# Altium PCB SC8701_EVM_RE1_0624.PcbDoc
Units mil, origin at the board's own origin, x right, y up, seen from the top; angles counter-clockwise.
Board outline 3937.01 x 2559.06 mil, 2 copper layers (Top Layer, Bottom Layer), stack 60.433 mil thick; 126 components, 56 nets, 343 pads, 339 vias.
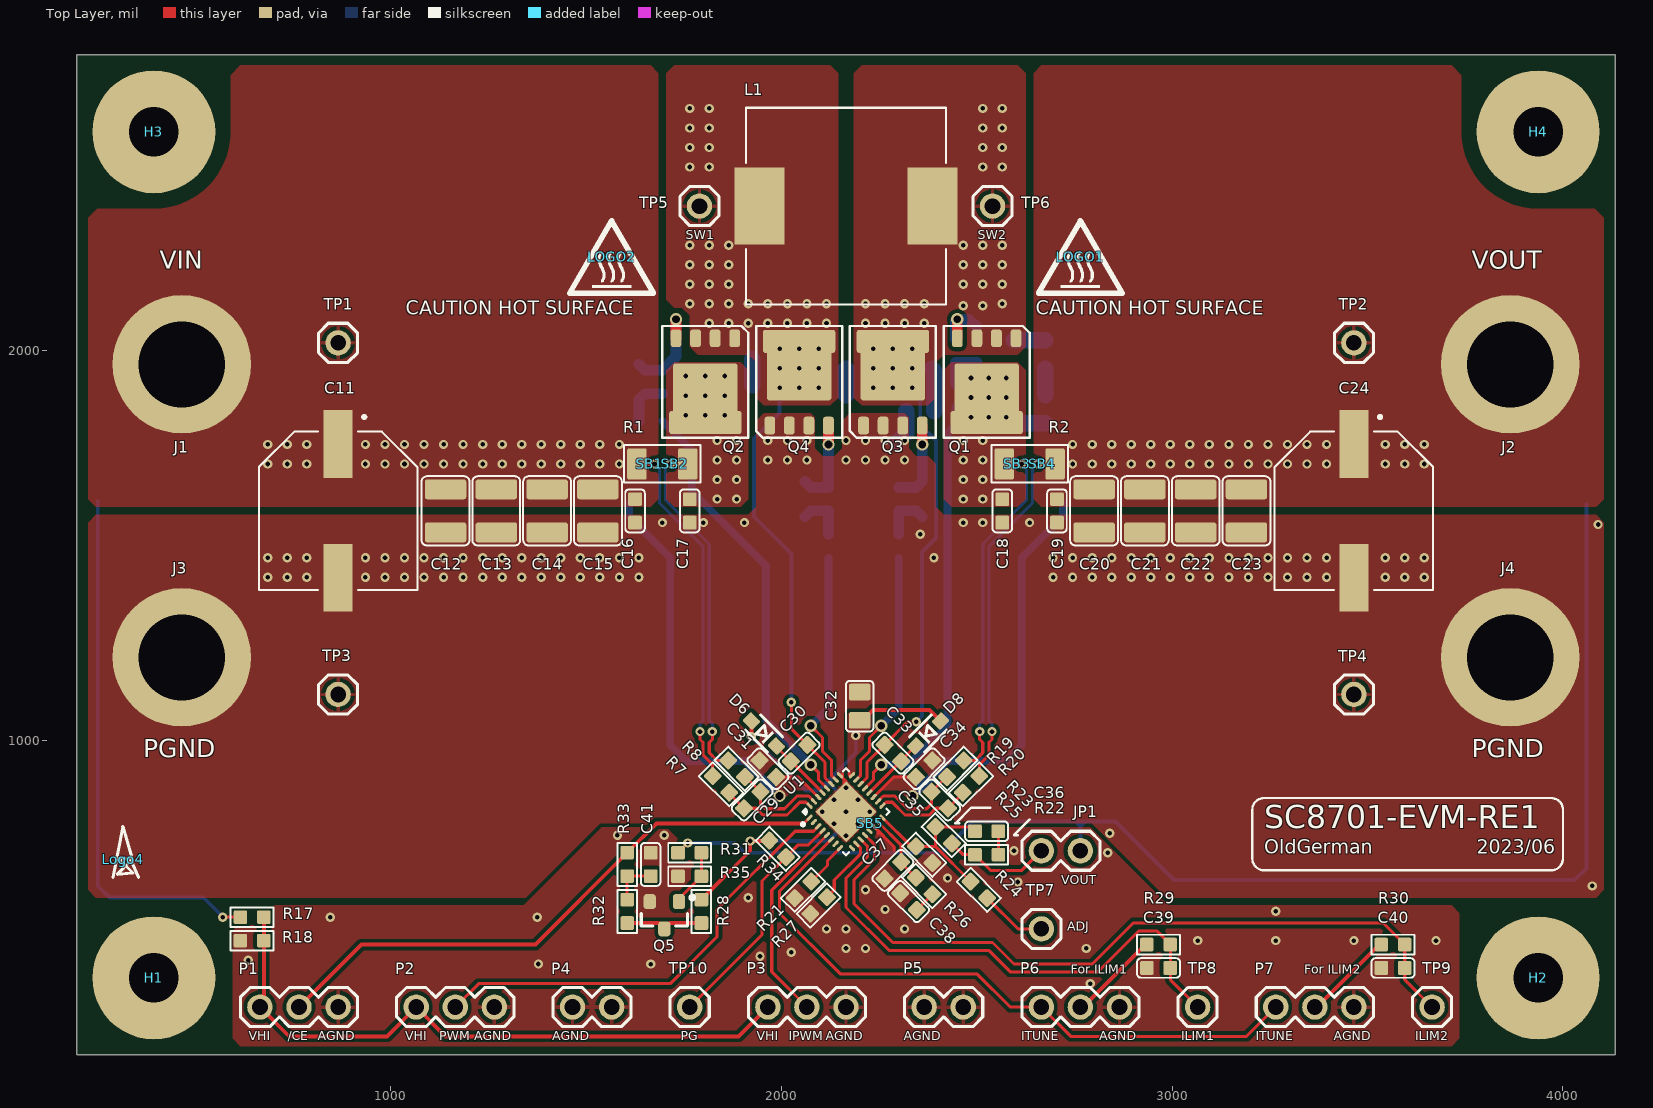
[diagram p0: Top Layer view]
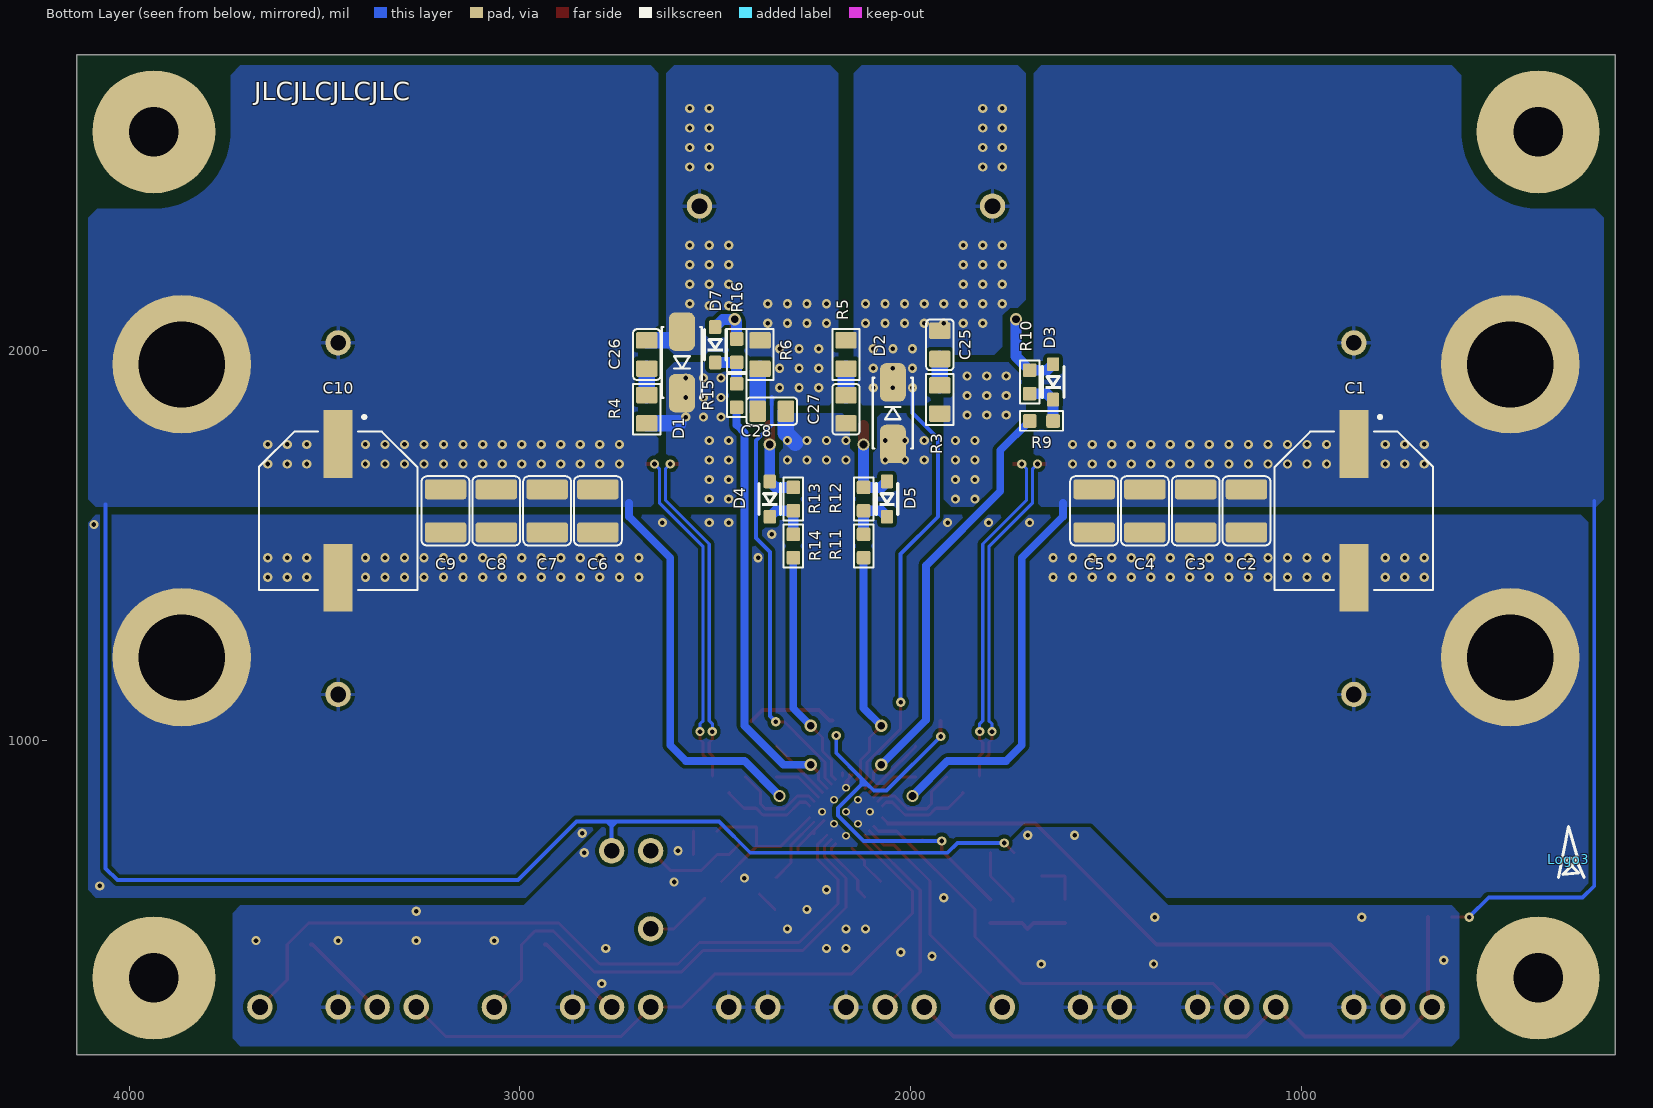
[diagram p1: Bottom Layer view, seen from below]
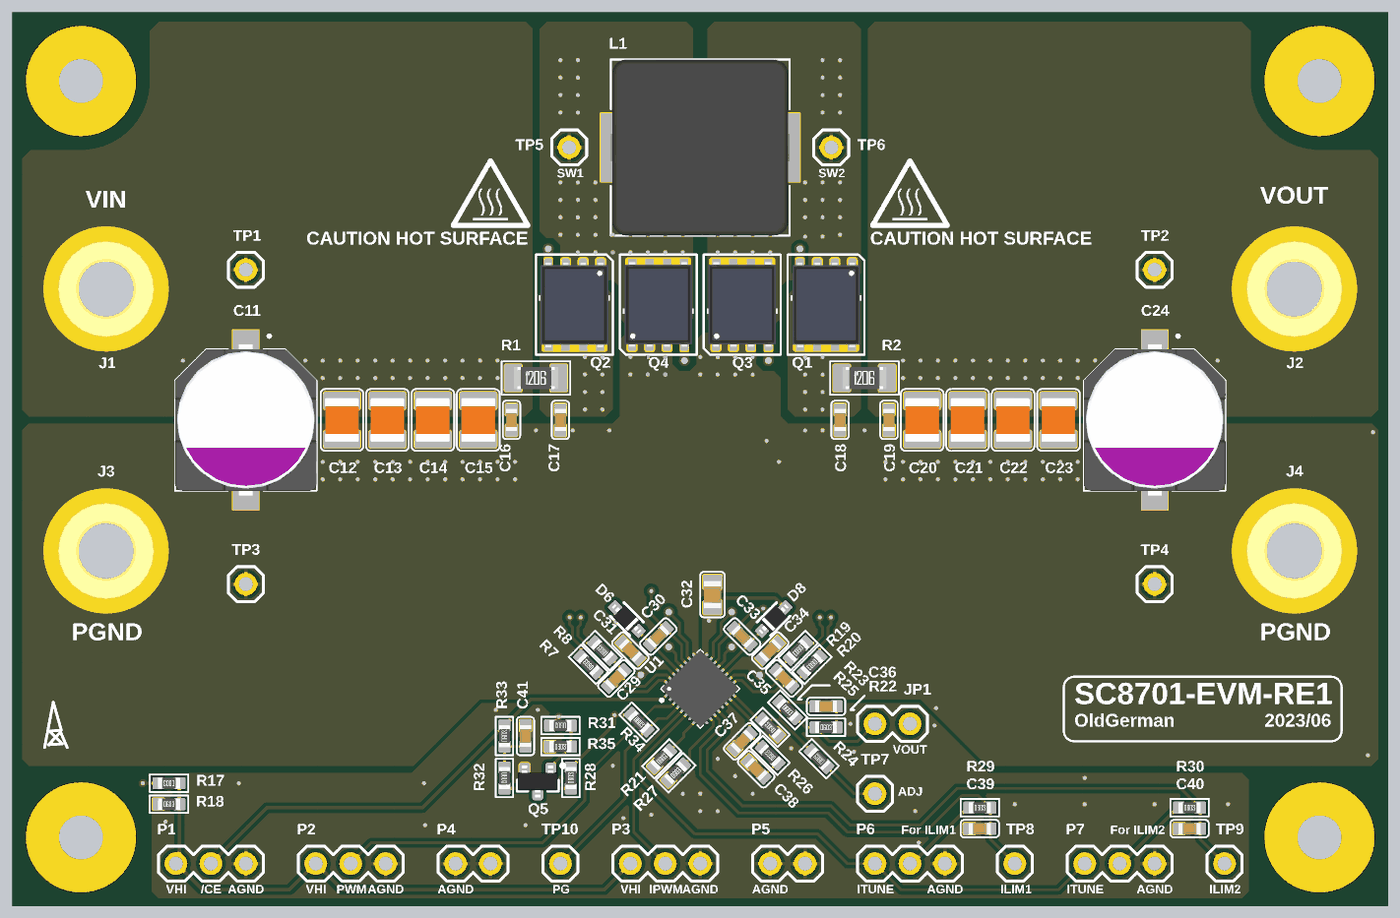
[diagram p2: 3D render of the assembled board from above, using the file's embedded part models]
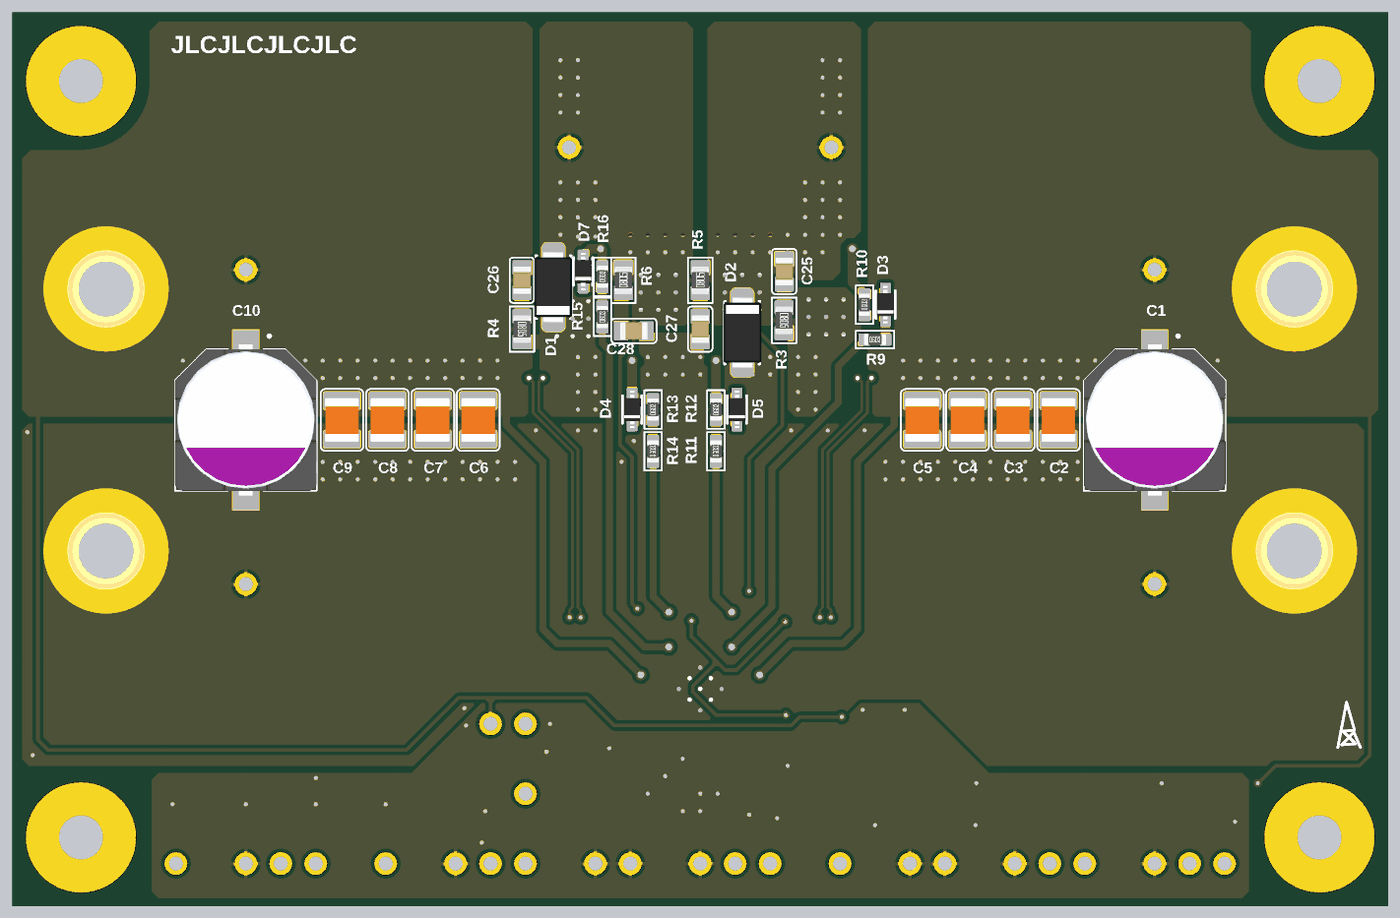
[diagram p3: 3D render of the assembled board from below, using the file's embedded part models]

## Layer stack, top to bottom
Top Solder: solder mask 0.4, Solder Resist, Dk 3.5
Top Layer: signal copper 1.378
Dielectric2: core 57.6772, Dk 4.2
Bottom Layer: signal copper 1.378
Bottom Solder: solder mask 0.4, Solder Resist, Dk 3.5

## Board outline
196.85,196.85 196.85,2755.91 4133.86,2755.91 4133.86,196.85

## Design rules (kind name [scope] priority, off if disabled: settings)
BoardOutlineClearance [All] p1: gap=11.81 ignorepadtopadclearanceinfootprint=FALSE except(0: Arc-SplitContinuation Track-SplitContinuation SMDPad-SplitContinuation THPad-SplitContinuation Via-SplitContinuation Fill-SplitContinuation Poly-SplitContinuation Region-SplitContinuation Text-SplitContinuation)
Clearance "Stitching VOUT" [IsStitchingVia and InNet('VOUT') vs (IsVia and (Not IsStitchingVia)) Or IsPad] p1: gap=5 ignorepadtopadclearanceinfootprint=FALSE
Clearance "PGND vs via" [(InNet('GND') AND InPolygon) vs IsVia] p2: gap=12 ignorepadtopadclearanceinfootprint=FALSE except(0: Arc-Hole Track-Hole SMDPad-Hole THPad-Hole Via-Hole Fill-Hole Poly-Hole Region-Hole Text-Hole)
Clearance "pour clearance_1" [InPolygon] p3: gap=10 ignorepadtopadclearanceinfootprint=FALSE except(0: Arc-Hole Track-Hole SMDPad-Hole THPad-Hole Via-Hole Fill-Hole Poly-Hole Region-Hole Text-Hole)
Clearance [All] p4: gap=7.8 ignorepadtopadclearanceinfootprint=FALSE except(0: Arc-Hole Track-Hole SMDPad-Hole THPad-Hole Via-Hole Fill-Hole Poly-Hole Region-Hole Text-Hole; 5.91: Arc-Via Track-Via SMDPad-SMDPad)
DiffPairsRouting [All] p1: maxlimit=10 minlimit=7.87 mostfreqgap=7.87 toplayer_minwidth=7.87 toplayer_maxwidth=15 toplayer_prefwidth=7.87 bottomlayer_minwidth=7.87 bottomlayer_maxwidth=15 bottomlayer_prefwidth=7.87 maxuncoupledlength=500
HoleSize [All] p1: absolutevalues=TRUE maxlimit=270 minlimit=11 maxpercent=80.000 minpercent=20.000
MinimumSolderMaskSliver [All] p1: minsoldermaskwidth=0
PolygonConnect HOLE_J1-J4 [InComponent('J1') OR InComponent('J2') OR InComponent('J3') OR InComponent('J4')] p1: connectstyle=Direct reliefconductorwidth=10 reliefentries=4 polygonreliefangle="90 Angle" airgapwidth=10
PolygonConnect HOLE [All] p2: thpad.connectstyle=Relief thpad.reliefconductorwidth=10 thpad.reliefentries=4 thpad.polygonreliefangle="90 Angle" thpad.airgapwidth=10 smdpad.connectstyle=Direct smdpad.reliefconductorwidth=10 smdpad.reliefentries=4 smdpad.polygonreliefangle="90 Angle" smdpad.airgapwidth=10 via.connectstyle=Direct via.reliefconductorwidth=10 via.reliefentries=4 via.polygonreliefangle="90 Angle" via.airgapwidth=10
PolygonConnect [All] p3: connectstyle=Direct reliefconductorwidth=10 reliefentries=4 polygonreliefangle="90 Angle" airgapwidth=10
RoutingVias [All] p1: holewidth=11.81 width=23.62 viastyle="Through Hole" minholewidth=11.81 minwidth=23.62 maxholewidth=39.37 maxwidth=78.74
ShortCircuit [InNet('AGND') vs InNet('PGND')] p1: allowed=TRUE
SilkToSilkClearance [All] p1 off: silktosilkclearance=7
SilkToSolderMaskClearance [IsPad] p1 off: minsilkscreentomaskgap=7 clearancetoexposedcopper=TRUE
SolderMaskExpansion SolderMaskExpansion_Via [ObjectKind = 'Via'] p1: expansion=2 istentingtop=TRUE
SolderMaskExpansion [All] p2: expansion=2 istentingtop=FALSE
Width [All] p1: maxlimit=100 minlimit=7.87 preferedwidth=7.87
24 further rules are at their usual default settings.

## Classes and differential pairs
differential pair SNS2: +SNS2_P -SNS2_N
differential pair SNS1: +SNS1_P -SNS1_N
differential pair .SNS2: +.SNS2_P -.SNS2_N
differential pair .SNS1: +.SNS1_P -.SNS1_N

## Components (designator, comment, footprint, x,y, rotation, side; value= is the part's Value field where it differs from the comment)
C1 "100uF/50V" "CAP OS-CON D=10.0 L=10.0 F10" 865.35,1588.9 r270 bottom
C2 "10uF/50V" C1210 1140.35,1588.9 r90 bottom
C3 "10uF/50V" C1210 1270.35,1588.9 r90 bottom
C4 "10uF/50V" C1210 1400.35,1588.9 r90 bottom
C5 "10uF/50V" C1210 1530.35,1588.9 r90 bottom
C6 "10uF/50V" C1210 2800.35,1588.9 r90 bottom
C7 "10uF/50V" C1210 2930.35,1588.9 r90 bottom
C8 "10uF/50V" C1210 3060.35,1588.9 r90 bottom
C9 "10uF/50V" C1210 3190.35,1588.9 r90 bottom
C10 "100uF/50V" "CAP OS-CON D=10.0 L=10.0 F10" 3465.35,1588.9 r270 bottom
C11 "100uF/50V" "CAP OS-CON D=10.0 L=10.0 F10" 865.35,1588.9 r270 top
C12 "10uF/50V" C1210 1140.35,1588.9 r90 top
C13 "10uF/50V" C1210 1270.35,1588.9 r90 top
C14 "10uF/50V" C1210 1400.35,1588.9 r90 top
C15 "10uF/50V" C1210 1530.35,1588.9 r90 top
C16 "100nF/50V" C0603 1625.35,1588.9 r90 top
C17 "100nF/50V" C0603 1765.35,1588.9 r90 top
C18 "100nF/50V" C0603 2565.35,1588.9 r90 top
C19 "100nF/50V" C0603 2705.35,1588.9 r90 top
C20 "10uF/50V" C1210 2800.35,1588.9 r90 top
C21 "10uF/50V" C1210 2930.35,1588.9 r90 top
C22 "10uF/50V" C1210 3060.35,1588.9 r90 top
C23 "10uF/50V" C1210 3190.35,1588.9 r90 top
C24 "100uF/50V" "CAP OS-CON D=10.0 L=10.0 F10" 3465.35,1588.9 r270 top
C25 "NPO/NC" C0805 1925.08,2013.85 r270 bottom
C26 "NPO/NC" C0805 2675.35,1988.9 r270 bottom
C27 "NPO/NC" C0805 2165.35,1848.9 r90 bottom
C28 "NPO/NC" C0805 2355.35,1843.9 r0 bottom
C29 "47pF/6.3V" C0603 1925.35,848.9 r45 top
C30 "100nF/16V" C0603 2045.35,968.9 r45 top
C31 "1uF/50V" C0603 1965.35,928.9 r135 top
C32 "1uF/25V" C0805 2200.35,1088.9 r90 top
C33 "100nF/16V" C0603 2285.35,968.9 r315 top
C34 "1uF/50V" C0603 2365.35,928.9 r45 top
C35 "47pF/6.3V" C0603 2405.35,848.9 r315 top
C36 "NC" C0603 2525.35,768.9 r0 top
C37 "NC" C0603 2285.35,668.9 r45 top
C38 "15nF/6.3V" C0603 2325.35,588.9 r315 top
C39 "10nF/6.3V" C0603 2965.35,418.9 r0 top
C40 "10nF/6.3V" C0603 3565.35,418.9 r0 top
C41 "1uF/50V" C0603 1665.35,683.9 r90 top
D1 "SS54F" SMAF 2585.35,1968.9 r270 bottom
D2 "SS54F" SMAF 2045.35,1838.9 r90 bottom
D3 "1N4148" SOD-323 1635.35,1918.9 r270 bottom
D4 "1N4148" SOD-323 2360.35,1618.9 r270 bottom
D5 "1N4148" SOD-323 2060.35,1618.9 r270 bottom
D6 "1N4148" SOD-323 1955.35,1018.9 r315 top
D7 "1N4148" SOD-323 2500.35,2013.9 r270 bottom
D8 "1N4148" SOD-323 2375.35,1018.9 r225 top
H1 "HOLE" "M3.2 D=8" 393.7,393.7 r0 top
H2 "HOLE" "M3.2 D=8" 3937.01,393.7 r0 top
H3 "HOLE" "M3.2 D=8" 393.7,2559.06 r0 top
H4 "HOLE" "M3.2 D=8" 3937.01,2559.06 r0 top
J1 "U6047" JACK_BANANA_U6047 465.35,1963.9 r180 top
J2 "U6047" JACK_BANANA_U6047 3865.35,1963.9 r270 top
J3 "U6047" JACK_BANANA_U6047 465.35,1213.9 r180 top
J4 "U6047" JACK_BANANA_U6047 3865.35,1213.9 r270 top
JP1 "CONN_X2_DOT" 2.54mm_Male_x2 2765.35,718.9 r180 top
L1 "3.3uH" "INDUCTOR 1350 12.6X13.5X5.0mm" 2165.35,2368.9 r0 top locked
LOGO1 "CAUTION HOT SURFACE" IEC_HotSurface_Small 2765.35,2238.9 r0 top
LOGO2 "CAUTION HOT SURFACE" IEC_HotSurface_Small 1565.35,2238.9 r0 top
Logo3 "OldGerman Symbol" ODG_LOGO 315.35,696.9 r180 bottom
Logo4 "OldGerman Symbol" ODG_LOGO 315.35,696.9 r0 top
P1 "CONN_X3" 2.54mm_Male_x3 665.35,318.9 r0 top
P2 "CONN_X3" 2.54mm_Male_x3 1265.35,318.9 r180 top
P3 "CONN_X3" 2.54mm_Male_x3 2165.35,318.9 r180 top
P4 "CONN_X2" 2.54mm_Male_x2 1465.35,318.9 r0 top
P5 "CONN_X2" 2.54mm_Male_x2 2365.35,318.9 r0 top
P6 "CONN_X3" 2.54mm_Male_x3 2665.35,318.9 r0 top
P7 "CONN_X3" 2.54mm_Male_x3 3465.35,318.9 r180 top
Q1 "N-MOS_GDS" "SO8FL ROUND" 2525.35,1918.9 r270 top
Q2 "N-MOS_GDS" "SO8FL ROUND" 1805.35,1918.9 r270 top
Q3 "N-MOS_GDS" "SO8FL ROUND" 2285.35,1918.9 r90 top
Q4 "N-MOS_GDS" "SO8FL ROUND" 2045.35,1918.9 r90 top
Q5 "N-MOS" "INFINEON SOT-23-3" 1700.35,553.9 r270 top
R1 "10mR" R1206 1695.35,1708.9 r0 top
R2 "10mR" R1206 2635.35,1708.9 r0 top
R3 "NC" R0805 1925.35,1873.9 r270 bottom
R4 "NC" R0805 2675.35,1848.9 r270 bottom
R5 "NC" R0805 2165.35,1988.9 r90 bottom
R6 "NC" R0805 2385.35,1988.9 r90 bottom
R7 "1K" R0603 1845.35,888.9 r135 top
R8 "1K" R0603 1885.35,928.9 r135 top
R9 "0R" R0603 1665.35,1818.9 r180 bottom
R10 "0R" R0603 1695.35,1918.9 r90 bottom
R11 "0R" R0603 2120.35,1498.9 r90 bottom
R12 "0R" R0603 2120.35,1618.9 r90 bottom
R13 "0R" R0603 2300.35,1618.9 r90 bottom
R14 "0R" R0603 2300.35,1498.9 r90 bottom
R15 "0R" R0603 2445.35,1883.9 r90 bottom
R16 "0R" R0603 2445.35,1998.9 r90 bottom
R17 "100K" R0603 645.35,548.9 r180 top
R18 "150K" R0603 645.35,488.9 r0 top
R19 "1K" R0603 2445.35,928.9 r225 top
R20 "1K" R0603 2485.35,888.9 r225 top
R21 "0R" R0603 2055.35,618.9 r45 top
R22 "NC" R0603 2525.35,708.9 r0 top
R23 "100K" R0603 2415.35,758.9 r315 top
R24 "NC" R0603 2505.35,618.9 r135 top
R25 "32.4K" R0603 2365.35,708.9 r135 top
R26 "15K" R0603 2365.35,628.9 r135 top
R27 "68K" R0603 2095.35,578.9 r45 top
R28 "200K" R0603 1795.35,563.9 r90 top
R29 "12.1K" R0603 2965.35,478.9 r0 top
R30 "40.2K" R0603 3565.35,478.9 r0 top
R31 "10K" R0603 1765.35,713.9 r180 top
R32 "100K" R0603 1605.35,563.9 r270 top
R33 "100K" R0603 1605.35,683.9 r90 top
R34 "100K" R0603 1990.35,723.9 r315 top
R35 "24K" R0603 1765.35,653.9 r0 top
SB1 "NetTie_200um" NetTie_200um 1663.54,1708.9 r180 top net-tie
SB2 "NetTie_200um" NetTie_200um 1727.17,1708.9 r0 top net-tie
SB3 "NetTie_200um" NetTie_200um 2603.54,1708.9 r180 top net-tie
SB4 "NetTie_200um" NetTie_200um 2667.17,1708.9 r0 top net-tie
SB5 "NetTie_200um" NetTie_200um 2227.99,789.67 r135 top net-tie
TP1 "CONN_X1_DOT" 2.54mm_Male_x1 865.35,2018.9 r0 top
TP2 "CONN_X1_DOT" 2.54mm_Male_x1 3465.35,2018.9 r0 top
TP3 "CONN_X1_DOT" 2.54mm_Male_x1 865.35,1118.9 r0 top
TP4 "CONN_X1_DOT" 2.54mm_Male_x1 3465.35,1118.9 r90 top
TP5 "CONN_X1_DOT" 2.54mm_Male_x1 1790.35,2368.9 r0 top
TP6 "CONN_X1_DOT" 2.54mm_Male_x1 2540.35,2368.9 r0 top
TP7 "CONN_X1_DOT" 2.54mm_Male_x1 2665.35,518.9 r0 top
TP8 "CONN_X1_DOT" 2.54mm_Male_x1 3065.35,318.9 r180 top
TP9 "CONN_X1_DOT" 2.54mm_Male_x1 3665.35,318.9 r180 top
TP10 "CONN_X1_DOT" 2.54mm_Male_x1 1765.35,318.9 r0 top
U1 "SC8701 (A)" "TQFN-32 4X4MM 0.4 VIA" 2165.35,818.9 r45 top locked

## Footprints (in the part's own frame and the unit in brackets; to place one, negate y for a bottom-side part, rotate by r counter-clockwise, add the part's x,y. Pads: shape width x height; smd on the part's side, far side on the other; paste and mask are expansions set on the pad)
2.54mm_Male_x1 [mm]
  round 1.65 hole 1.016: 1(0,0)
  silkscreen extent -1.27,-1.27 1.27,1.27
2.54mm_Male_x2 [mm]
  round 1.65 hole 1.016: 1(0,0) 2(2.54,0)
  silkscreen extent -1.27,-1.27 3.81,1.27
2.54mm_Male_x3 [mm]
  round 1.65 hole 1.016: 1(0,0) 2(2.54,0) 3(5.08,0)
  silkscreen extent -1.27,-1.27 6.35,1.27
C0603 [mil]
  rrect20% 35x35 smd: 1(-30,0) 2(30,0)
  silkscreen extent -55,-25 55,25, body extent -31,-16 32,16, height 32
C0805 [mil]
  rrect20% 42.5x55 smd: 1(-36.26,0) 2(36.26,0)
  silkscreen extent -65,-35 65,35, body extent -39,-25 39,25, height 49
C1210 [mm] "Chip Capacitor, 2-Leads, Body 3.20x2.50mm, IPC Medium Density"
  rrect25% 1.3x2.7 smd: 1(-1.4,0) 2(1.4,0)
  silkscreen extent -2.25,-1.55 2.25,1.55, body extent -1.6,-1.25 1.6,1.25, height 2.8
"CAP OS-CON D=10.0 L=10.0 F10" [mm]
  rect 4.4x1.9 smd: 1(-4.35,0) 2(4.35,0)
  silkscreen extent -6.2,-5.15 5.15,5.15, body extent -5.5,-5.15 5.5,5.15, height 10.4
IEC_HotSurface_Small [mil] "CAUTION HOT SURFACE"
  silkscreen extent -107,-93 107,92
"INDUCTOR 1350 12.6X13.5X5.0mm" [mm]
  rect 3.25x5 smd: 1(-5.625,0) 2(5.625,0)
  silkscreen extent -6.5,-6.4 6.5,6.4, body extent -6.5,-6.4 6.5,6.4, height 6.2
"INFINEON SOT-23-3" [mm] "SOT23, 3-Leads, Body 2.90x2.40mm, Pitch 0.95mm, IPC Medium Density"
  rrect50% 0.972x0.802 smd: 1(-0.885,0.95) 2(-0.885,-0.95) 3(0.885,0)
  silkscreen extent -1.27,-1.5 0.7,1.95, body extent -1.16,-1.45 1.16,1.45, height 1
JACK_BANANA_U6047 [mm] "Banana Jack"
  round 9 hole 5.6: 1(0,0)
  body extent -3.49,-3.5 3.49,3.5, height 2
"M3.2 D=8" [mm]
  round 8 hole 3.2: 1(0,0)
NetTie_200um [mm]
  round 0.2 smd paste-2 mask-2: 1(-0.3,0) 2(0.3,0)
  Top Layer region: -0.3,0.1 -0.3,-0.1 0.3,-0.1 0.3,0.1
ODG_LOGO [mil]
  silkscreen extent -26,-46 39,84
R0603 [mil]
  rrect25% 35x35 smd: 1(-30,0) 2(30,0)
  silkscreen extent -55,-25 55,25, body extent -31,-16 31,16, height 18
R0805 [mil]
  rrect20% 42.5x55 smd: 1(-36.26,0) 2(36.26,0)
  silkscreen extent -65,-35 65,35, body extent -39,-25 39,25, height 24
R1206 [mil]
  rrect20% 50x80 smd: 1(-65,0) 2(65,0)
  silkscreen extent -98,-48 98,48, body extent -63,-31 63,31, height 24
SMAF [mm]
  rrect50% 2.5x1.7 smd: 1(-2,0) 2(2,0)
  silkscreen extent -2.3,-1.3 2.3,1.3, body extent -2.6,-1.4 2.6,1.35, height 2.4
"SO8FL ROUND" [mm] "AND9137/D Universal Footprint"
  rrect12% 3.3x4.2 smd paste-10: D(0.438,0)
  rrect20% 1.5x4.7 smd paste-10: D(2.638,0)
  rrect50% 1.15x0.7 smd paste-0.05: G(-2.837,-1.905) S(-2.837,1.905) S(-2.837,-0.635) S(-2.837,0.635)
  rect 0.6x0.9 on Top Paste: ""(-0.662,1.15) ""(-0.662,0) ""(-0.662,-1.15) ""(0.188,1.15) ""(0.188,0) ""(0.188,-1.15) ""(1.038,1.15) ""(1.038,0) ""(1.038,-1.15) ""(1.888,1.15) ""(1.888,0) ""(1.888,-1.15)
  rect 0.9x0.6 on Top Paste: ""(2.888,1.875) ""(2.888,-0.65) ""(2.888,0.65) ""(2.888,-1.875)
  silkscreen extent -3.64,-2.79 3.64,2.8, body extent -3.06,-2.58 3.09,2.57, height 1.13
SOD-323 [mm] "AND9137/D：Universal Footprint for  SO8FL Package"
  rrect25% 0.9x0.8 smd: 1(-1.15,0) 2(1.15,0)
  silkscreen extent -1,-0.7 1,0.7, body extent -1.36,-0.62 1.36,0.63, height 1.05
"TQFN-32 4X4MM 0.4 VIA" [mm]
  oval 0.5x0.2 smd: 1(-1.95,1.4) 2(-1.95,1) 3(-1.95,0.6) 4(-1.95,0.2) 5(-1.95,-0.2) 6(-1.95,-0.6) 7(-1.95,-1) 8(-1.95,-1.4) 17(1.95,-1.4) 18(1.95,-1) 19(1.95,-0.6) 20(1.95,-0.2) 21(1.95,0.2) 22(1.95,0.6) 23(1.95,1) 24(1.95,1.4)
  oval 0.2x0.5 smd: 9(-1.4,-1.95) 10(-1,-1.95) 11(-0.6,-1.95) 12(-0.2,-1.95) 13(0.2,-1.95) 14(0.6,-1.95) 15(1,-1.95) 16(1.4,-1.95) 25(1.4,1.95) 26(1,1.95) 27(0.6,1.95) 28(0.2,1.95) 29(-0.2,1.95) 30(-0.6,1.95) 31(-1,1.95) 32(-1.4,1.95)
  rect 2.8x2.8 smd paste-5: 33(0,0)
  silkscreen extent -2.66,-2 2,2, body extent -2,-2 2,2, height 0.55

## Part data
C1 C10 C11 C24: library part CAP_Polar_Aluminum, "Capacitor"
C2 C3 C4 C5 C6 C7 C8 C9 C12 C13 C14 C15 C16 C17 C18 C19 C20 C21 C22 C23 C25 C26 C27 C28 C29 C30 C31 C32 C33 C34 C35 C36 C37 C38 C39 C40 C41: library part CAP, "Capacitor"
D1 D2 D3 D4 D5 D6 D7 D8: library part Diode, "二极管"
J1 J2 J3 J4: library part JACK_BANANA, "Banana Jack", Manufacturer=Keystone, PartNumber=575-8, Supplier Part Number 1=36-575-8-ND, ComponentLink1Description="Datasheet Link", ComponentLink1URL=http://www.keyelco.com/pdfs/M55p95.pdf, CompType=Connector, LatestRevisionDate=2015-08-25, MountType=TH, PackageReference=Keystone575-8, Publisher="Texas Instruments", RoHS=Y, Supplier 1=Digi-Key, U/M=EA
L1: library part Inductor_power, "135 功率电感 额定电流15A"
LOGO1 LOGO2: library part IEC_HotSurface, "IEC 61010-1 Hot Surface Warning", LatestRevisionDate=2014-11-20, Published=2009-03-03, Publisher="Texas Instruments", SymbolCreator=a0412235, SymbolVersion=2011-08-22
Logo3 Logo4: library part OldGeman, LatestRevisionDate=2014-11-20, Published=2009-03-03, Publisher="Texas Instruments", SymbolCreator=a0412235, SymbolVersion=2011-08-22
Q5: library part N-MOS_123
R1 R2 R3 R4 R5 R6 R7 R8 R9 R10 R11 R12 R13 R14 R15 R16 R17 R18 R19 R20 R21 R22 R23 R24 R25 R26 R27 R28 R29 R30 R31 R32 R33 R34 R35: library part RES, "IEC Standard"
SB1 SB2 SB3 SB4 SB5: library part "NetTie 0.2mm", "Net Tie", Part number IPS=N.A., Artikkelnr Noca=N.A., Component Class=Connectors, ComponentLink1Description=Datasheet, ComponentLink2Description="Supplier link", Footprint Doc=NetTie, LatestRevisionDate=2019-10-07, Pad Count=2, Part Number="NetTie 0.2mm", PartId=100500654, Pin Count=2, Published=2019-10-07, Publisher="Nordic Semiconductor"
U1: "高效率, 同步, 4 管升降压控制器"

## Via types
v1: diameter 23.62, hole 11.81, Top Layer to Bottom Layer, tented both sides, 320 vias
v2: diameter 31.5, hole 19.68, Top Layer to Bottom Layer, tented both sides, 10 vias
v3: diameter 19.68, hole 11.81, Top Layer to Bottom Layer, tented both sides, 9 vias

## Nets (pads, with @x,y where several pads share a name; then routed paths per layer and width w, separated by ;. In a path a pad name is that pad's centre, name@x,y a point inside that pad or via, vN(x,y) a via of type N, cw(c..) or ccw(c..) an arc to the next point about the centre after c; other vN are vias at no path point)
.SNS1_N: C29.2 R8.1 U1.31 | length 247.7
  Top Layer w7.87: R8.1 1908.99,907.68 C29.2 1946.57,838.82 1958.99,826.4 2007.85,826.4 2040.35,858.9 2069.68,858.9 U1.31
.SNS1_P: C29.1 R7.1 U1.32 | length 247.7
  Top Layer w7.87: R7.1 1866.57,865.26 C29.1 1935.43,827.68 1952.47,810.65 2014.38,810.65 2046.88,843.15 2063.15,843.15 U1.32
.SNS2_N: C35.2 R20.2 U1.17 | length 247.7
  Top Layer w7.87: U1.17 2267.56,843.15 2283.83,843.15 2316.33,810.65 2378.24,810.65 2395.28,827.68 C35.2 2464.14,865.26 R20.2
.SNS2_P: C35.1 R19.2 U1.18 | length 247.7
  Top Layer w7.87: U1.18 2261.03,858.9 2290.35,858.9 2322.85,826.4 2371.72,826.4 2384.14,838.82 C35.1 2421.71,907.68 R19.2
/CE: P1.2 R33.2 U1.1 | length 1507.5
  Top Layer w7.87: 2057.41,788.9 U1.1
  Top Layer w10: P1.2 925.35,478.9 1370.35,478.9 R33.2 1680.35,788.9 2057.41,788.9
AGND: C37.1 C38.1 C39.1 C40.1 C41.2 P1.3 P2.1 P3.1 P4.1 P4.2 P5.1 P5.2 P6.3 P7.1 Q5.2 R18.1 R21.1 R25.1 R27.1 R35.1 SB5.1 U1.14 | length 91.1
  Top Layer w7.87: U1.14 2288.4,729.25 2288.4,720.51 ; 2246.84,762.04 2246.84,770.78
  other v1: 2790.35,378.9 1378,428.96 1665.35,428.9 635.35,438.9 1945.35,448.9 2025.35,458.9 2165.35,468.9 2215.35,468.9 2780.35,468.9 3065.35,488.9 3265.35,488.9 3465.35,488.9 3675.35,488.9 2115.35,518.9 2165.35,518.9 2315.35,518.9 845.35,548.9 1375.35,548.9 3265.35,563.9 2265.35,568.9 1915.35,598.9 2215.35,618.9 2605.35,638.9 2425.35,648.9 2835.35,713.9 2595.35,718.9 1580.35,758.9 1700.35,758.9
ILIM1: C39.2 R29.2 TP8.1 U1.11 | length 1349.3
  Top Layer w7.87: U1.11 2220.35,730.49 2220.35,703.9 2165.35,648.9 2165.35,573.9 2275.35,463.9 2530.35,463.9 2585.35,408.9 2810.35,408.9 2915.35,513.9 2960.35,513.9 R29.2 C39.2 2995.35,388.9 TP8.1
ILIM2: C40.2 R30.2 TP9.1 U1.12 | length 1936.2
  Top Layer w7.87: U1.12 2237.85,735.26 2237.85,696.4 2185.35,643.9 2185.35,583.9 2285.35,483.9 2540.35,483.9 2595.35,428.9 2795.35,428.9 2900.35,533.9 3540.35,533.9 R30.2 C40.2 3595.35,388.9 TP9.1
IPWM: P3.2 U1.5 | length 535.9
  Top Layer w7.87: P3.2 1975.35,408.9 1975.35,617.76 U1.5
ITUNE: P6.1 P7.3 U1.6 | length 1675.4
  Top Layer w7.87: U1.6 1995.35,615.49 1995.35,558.9 2150.35,403.9 2500.35,403.9 2585.35,318.9 P6.1 2740.35,243.9 3190.35,243.9 P7.3
NetC17_2: C17.2 Q2.D R1.2 R3.2 SB2.2
  other v1: 1835.35,1618.9 1885.35,1618.9 1835.35,1668.9 1885.35,1668.9 1835.35,1718.9 1885.35,1718.9 1835.35,1768.9 1885.35,1768.9 1755.35,1833.9 1805.35,1833.9 1855.35,1833.9 1755.35,1883.9 1805.35,1883.9 1855.35,1883.9 1755.35,1933.9 1805.35,1933.9 1855.35,1933.9
NetC18_2: C18.2 D1.2 Q1.D R2.1 R4.2 SB3.2 | length 80
  Bottom Layer w42.5: 2595.35,1812.64 R4.2
  other v1: 2465.35,1618.9 2515.35,1618.9 2465.35,1668.9 2515.35,1668.9 2465.35,1718.9 2515.35,1718.9 2465.35,1768.9 2515.35,1768.9 2485.35,1828.9 2530.35,1828.9 2575.35,1828.9 2485.35,1878.9 2530.35,1878.9 2575.35,1878.9 2485.35,1928.9 2530.35,1928.9 2575.35,1928.9
NetC25_1: C25.1 C30.2 D2.2 L1.1 Q2.S Q4.D R5.2 TP5.1 U1.27 | length 1122.7
  Top Layer w7.87: v1(2025.35,1098.9) 2025.35,1031.32 C30.2 2111.6,945.07 2111.6,906.05 U1.27
  Bottom Layer w10: v1(1995.35,1903.9) 1995.35,1838.9 1930.35,1773.9 1930.35,1573.9 2025.35,1478.9 v1(2025.35,1098.9)
  other v1: 2045.35,1903.9 2095.35,1903.9 1995.35,1953.9 2045.35,1953.9 2095.35,1953.9 1995.35,2003.9 2045.35,2003.9 2095.35,2003.9 1815.35,2068.9 1865.35,2068.9 1915.35,2068.9 1965.35,2068.9 2015.35,2068.9 2065.35,2068.9 2115.35,2068.9 1765.35,2118.9 1815.35,2118.9 1865.35,2118.9 1915.35,2118.9 1965.35,2118.9 2015.35,2118.9 2065.35,2118.9 2115.35,2118.9 1765.35,2168.9 1815.35,2168.9 1865.35,2168.9 1765.35,2218.9 1815.35,2218.9 1865.35,2218.9 1765.35,2268.9 1815.35,2268.9 1865.35,2268.9 1765.35,2468.9 1815.35,2468.9 1765.35,2518.9 1815.35,2518.9 1765.35,2568.9 1815.35,2568.9 1765.35,2618.9 1815.35,2618.9
NetC25_2: C25.2 R3.1 | length 67.2
  Bottom Layer w42.5: R3.1@1925.25,1910.49 C25.2@1925.25,1977.65
NetC26_1: C26.1 C33.1 D1.1 L1.2 Q1.S Q3.D R6.2 TP6.1 U1.22 | length 1179.6
  Top Layer w7.87: U1.22 2219.1,906.05 2219.1,945.07 C33.1 2322.93,1048.9 v1(2345.35,1048.9)
  Bottom Layer w10: v1(2345.35,1048.9) 2360.35,1063.9 2360.35,1483.9 2395.35,1518.9 2395.35,1768.9 2355.35,1808.9 2355.35,1880.13
  Bottom Layer w42.5: D1.1@2595.35,2025.16 C26.1
  other v1: 2235.35,1903.9 2285.35,1903.9 2335.35,1903.9 2235.35,1953.9 2285.35,1953.9 2335.35,1953.9 2235.35,2003.9 2285.35,2003.9 2335.35,2003.9 2215.35,2068.9 2265.35,2068.9 2315.35,2068.9 2365.35,2068.9 2465.35,2113.9 2515.35,2113.9 2215.35,2118.9 2265.35,2118.9 2315.35,2118.9 2365.35,2118.9 2565.35,2118.9 2465.35,2168.9 2515.35,2168.9 2565.35,2168.9 2465.35,2218.9 2515.35,2218.9 2565.35,2218.9 2465.35,2268.9 2515.35,2268.9 2565.35,2268.9 2515.35,2468.9 2565.35,2468.9 2515.35,2518.9 2565.35,2518.9 2515.35,2568.9 2565.35,2568.9 2515.35,2618.9 2565.35,2618.9
NetC26_2: C26.2 R4.1 | length 67.5
  Bottom Layer w42.5: R4.1 C26.2
NetC27_2: C27.2 R5.1 | length 67.5
  Bottom Layer w42.5: C27.2 R5.1
NetC28_2: C28.2 R6.1 | length 111.3
  Bottom Layer w42.5: R6.1 2391.61,1946.38 C28.2
NetC30_1: C30.1 D6.2 U1.29 | length 169
  Top Layer w7.87: D6.2 1987.37,984.46 C30.1 2025.43,947.68 U1.29
NetC33_2: C33.2 D8.2 U1.20 | length 167.7
  Top Layer w7.87: U1.20 C33.2@2305.28,947.68 ; C33.2 2306.57,950.11 D8.2
NetC36_1: C36.1 R23.1 R24.2 R25.2 U1.16 | length 449.1
  Top Layer w7.87: U1.16 2332.09,730.11 R25.2 2394.14,730.11 ; R24.2 2394.14,730.11 ; C36.1 2484.14,780.11 R23.1 2394.14,730.11
NetC36_2: C36.2 R22.2 | length 60
  Top Layer w7.87: R22.2 C36.2
NetC37_2: C37.2 R26.2 U1.15 | length 182.4
  Top Layer w7.87: U1.15 2306.57,733.36 C37.2 2306.57,687.68 R26.2
NetC38_2: C38.2 R26.1 | length 56.6
  Top Layer w7.87: C38.2 R26.1
NetC41_1: C41.1 R32.1 R33.1 | length 120
  Top Layer w7.87: R32.1 R33.1 C41.1
NetD3_1: D3.1 Q2.G R10.2 | length 259.1
  Top Layer w27.56: Q2.G v2(1730.35,2078.9)
  Bottom Layer w27.56: D3.1 1650.63,1948.9 R10.2 1730.35,1983.9 v2(1730.35,2078.9)
NetD3_2: D3.2 R9.2 R10.1 | length 121.1
  Bottom Layer w27.56: R9.2 D3.2 1650.63,1888.9 R10.1
NetD4_1: D4.1 Q3.G R13.2 | length 209.3
  Top Layer w27.56: v2(2360.35,1758.9) Q3.G
  Bottom Layer w27.56: R13.2 2345.08,1648.9 D4.1 v2(2360.35,1758.9)
NetD4_2: D4.2 R13.1 R14.2 | length 126.3
  Bottom Layer w27.56: R14.2 R13.1 2345.08,1588.9 D4.2
NetD5_1: D5.1 Q4.G R12.2 | length 224.6
  Top Layer w27.56: v2(2120.35,1758.9) Q4.G
  Bottom Layer w27.56: D5.1 2075.63,1648.9 R12.2 v2(2120.35,1758.9)
NetD5_2: D5.2 R11.2 R12.1 | length 126.3
  Bottom Layer w27.56: D5.2 2075.63,1588.9 R12.1 R11.2
NetD7_1: D7.1 Q1.G R16.2 | length 158.5
  Top Layer w27.56: Q1.G v2(2450.35,2078.9)
  Bottom Layer w27.56: R16.2 2445.35,2073.9 v2(2450.35,2078.9) 2480.63,2078.9 D7.1
NetD7_2: D7.2 R15.2 R16.1 | length 110.1
  Bottom Layer w27.56: R15.2 R16.1 2500.08,1968.9 D7.2
NetJP1_2: JP1.2 R22.1 R23.2 | length 278
  Top Layer w7.87: R23.2 2465.35,708.9 R22.1 2535.35,668.9 2615.35,668.9 JP1.2
NetP6_2: P6.2 R29.1 | length 236.3
  Top Layer w10: P6.2 2771.65,318.9 2931.65,478.9 R29.1
NetP7_2: P7.2 R30.1 | length 236.3
  Top Layer w10: P7.2 3370.62,318.9 3530.62,478.9 R30.1
NetQ5_1: Q5.1 R31.1 R35.2 | length 149
  Top Layer w7.87: Q5.1 1737.76,596.3 R35.2 R31.1
NetQ5_3: Q5.3 R28.1 R32.2 | length 202.3
  Top Layer w10: R32.2 1685.51,533.9 Q5.3 1715.2,533.9 R28.1
NetR9_1: R9.1 U1.28 | length 1114.6
  Top Layer w7.87: v2(2075.35,938.9) 2095.35,918.9 2095.35,900.03 U1.28
  Bottom Layer w20: R9.1 1770.35,1743.9 1770.35,1638.9 1960.35,1448.9 1960.35,1053.9 v2(2075.35,938.9)
NetR11_1: R11.1 U1.26 | length 612.8
  Top Layer w7.87: v2(2075.35,1038.9) 2105.35,1008.9 2105.35,973.9 2127.85,951.4 2127.85,912.08 U1.26
  Bottom Layer w20: v2(2075.35,1038.9) 2120.35,1083.9 R11.1
NetR14_1: R14.1 U1.23 | length 612.8
  Top Layer w7.87: U1.23 2202.85,912.08 2202.85,951.4 2225.35,973.9 2225.35,1008.9 v2(2255.35,1038.9)
  Bottom Layer w20: v2(2255.35,1038.9) 2300.35,1083.9 R14.1
NetR15_1: R15.1 U1.21 | length 1112
  Top Layer w7.87: U1.21 2235.35,900.03 2235.35,918.9 v2(2255.35,938.9)
  Bottom Layer w20: v2(2255.35,938.9) 2325.35,938.9 2425.35,1038.9 2425.35,1788.9 2445.35,1808.9 R15.1
NetR21_2: R21.2 U1.8 | length 116
  Top Layer w7.87: R21.2 2117.85,681.4 2117.85,693.45 U1.8
NetR24_1: R24.1 TP7.1 | length 171.4
  Top Layer w7.87: R24.1 2605.35,518.9 TP7.1
NetR27_2: R27.2 U1.10 | length 177
  Top Layer w7.87: R27.2 2135.35,618.9 2135.35,643.9 2202.85,711.4 2202.85,725.72 U1.10
PG: R34.2 TP10.1 U1.4 | length 607.7
  Top Layer w7.87: TP10.1 1950.35,503.9 1950.35,641.47 R34.2 2042.78,733.9 2069.22,733.9 U1.4
PGND: C1.2 C2.1 C3.1 C4.1 C5.1 C6.1 C7.1 C8.1 C9.1 C10.2 C11.2 C12.1 C13.1 C14.1 C15.1 C16.1 C17.1 C18.1 C19.1 C20.1 C21.1 C22.1 C23.1 C24.2 C27.1 C28.1 C31.2 C32.2 C34.2 D2.1 J3.1 J4.1 Q3.S Q4.S SB5.2 TP3.1 TP4.1 U1.25 U1.33 | length 145.7
  Top Layer w7.87: U1.25 2165.35,896.85 v3(2165.35,880.14) ; U1.25@2156.2,906.15 2156.2,914.89 ; 2160.83,892.42 2160.83,901.17
  Bottom Layer w42.5: 2295.35,1763.9 2319.09,1787.64 C28.1
  other v1: 4075.35,628.9 2840.35,763.9 685.35,1418.9 735.35,1418.9 785.35,1418.9 935.35,1418.9 985.35,1418.9 1035.35,1418.9 1085.35,1418.9 1135.35,1418.9 1185.35,1418.9 1235.35,1418.9 1285.35,1418.9 1335.35,1418.9 1385.35,1418.9 1435.35,1418.9 1485.35,1418.9 1535.35,1418.9 1585.35,1418.9 1635.35,1418.9 2695.35,1418.9 2745.35,1418.9 2795.35,1418.9 2845.35,1418.9 2895.35,1418.9 2945.35,1418.9 2995.35,1418.9 3045.35,1418.9 3095.35,1418.9 3145.35,1418.9 3195.35,1418.9 3245.35,1418.9 3295.35,1418.9 3345.35,1418.9 3395.35,1418.9 3545.35,1418.9 3595.35,1418.9 3645.35,1418.9 685.35,1468.9 735.35,1468.9 785.35,1468.9 935.35,1468.9 985.35,1468.9 1035.35,1468.9 1085.35,1468.9 1135.35,1468.9 1185.35,1468.9 1235.35,1468.9 1285.35,1468.9 1335.35,1468.9 1385.35,1468.9 1435.35,1468.9 1485.35,1468.9 1535.35,1468.9 1585.35,1468.9 1635.35,1468.9 2390.35,1468.9 2695.35,1468.9 2745.35,1468.9 2795.35,1468.9 2845.35,1468.9 2895.35,1468.9 2945.35,1468.9 2995.35,1468.9 3045.35,1468.9 3095.35,1468.9 3145.35,1468.9 3195.35,1468.9 3245.35,1468.9 3295.35,1468.9 3345.35,1468.9 3395.35,1468.9 3545.35,1468.9 3595.35,1468.9 3645.35,1468.9 2355.35,1528.9 4090.35,1553.9 1695.35,1558.9 1800.35,1558.9 1905.35,1558.9 2465.35,1558.9 2515.35,1558.9 2635.35,1558.9 1965.35,1718.9 2015.35,1718.9 2065.35,1718.9 2165.35,1718.9 2215.35,1718.9 2265.35,1718.9 2315.35,1718.9 1965.35,1768.9 2015.35,1768.9 2065.35,1768.9 2165.35,1768.9 2215.35,1768.9 2265.35,1768.9 2315.35,1768.9
  other v3: 2165.35,757.65 2134.73,788.27 2195.98,788.27 2104.11,818.9 2165.35,818.9 2226.6,818.9 2134.73,849.52 2195.98,849.52
PWM: P2.2 U1.3 | length 1161.6
  Top Layer w7.87: P2.2 1225.35,378.9 1715.35,378.9 1835.35,498.9 1835.35,568.9 2035.35,768.9 2081.95,768.9 U1.3
SNS1_N: R8.2 SB2.1 | length 853.9
  Top Layer w7.87: v1(1823.19,1023.9) 1823.19,1003.9 1815.35,996.06 1815.35,970.03 1835.28,950.11 R8.2
  Bottom Layer w7.87: v1(1715.35,1708.9) 1703.23,1696.77 1703.23,1616.02 1815.35,1503.9 1815.35,1051.73 1823.19,1043.9 v1(1823.19,1023.9)
SNS1_P: R7.2 SB1.1 | length 866.9
  Top Layer w7.87: v1(1791.77,1023.9) 1791.77,1003.9 1799.61,996.06 1799.61,963.51 1824.14,938.97 R7.2
  Bottom Layer w7.87: v1(1675.35,1708.9) 1687.48,1696.77 1687.48,1609.5 1799.61,1497.37 1799.61,1051.73 1791.77,1043.9 v1(1791.77,1023.9)
SNS2_N: R20.1 SB4.1 | length 866.9
  Top Layer w7.87: R20.1 2506.57,938.97 2531.1,963.51 2531.1,996.06 2538.94,1003.9 v1(2538.94,1023.9)
  Bottom Layer w7.87: v1(2538.94,1023.9) 2538.94,1043.9 2531.1,1051.73 2531.1,1497.37 2643.23,1609.5 2643.23,1696.77 v1(2655.35,1708.9)
SNS2_P: R19.1 SB3.1 | length 853.9
  Top Layer w7.87: R19.1 2495.43,950.11 2515.35,970.03 2515.35,996.06 2507.52,1003.9 v1(2507.52,1023.9)
  Bottom Layer w7.87: v1(2507.52,1023.9) 2507.52,1043.9 2515.35,1051.73 2515.35,1503.9 2627.48,1616.02 2627.48,1696.77 v1(2615.35,1708.9)
VCC: C32.1 D6.1 D8.1 R28.2 R34.1 U1.24 | length 1366.3
  Top Layer w7.87: U1.24@2174.31,910.46 2174.31,919.2
  Top Layer w10: R28.2 1920.35,718.9 v1(1920.35,743.9) 1967.93,743.9 R34.1 ; v1(1922.85,1011.4) 1923.34,1011.88 D6.1 ; C32.1 2207.2,1052.64 2234.12,1079.55 2378.73,1079.55 D8.1
  Bottom Layer w10: v1@1921.35,743.9 2120.35,743.9 2186.1,809.65 2186.1,828.15 2125.62,888.63 ; v1(1922.85,1011.4) 2061.32,872.93 2094.38,872.93 2110.09,888.63 ; v1(2190.35,1013.9) 2190.35,968.9 2125.62,904.17 ; 2110.09,888.63 2125.62,904.17 ; 2110.09,888.63 2125.62,888.63 ; 2125.62,888.63 2125.62,904.17
VHI: P1.1 P2.3 P3.3 R17.1 R18.2 | length 1658.4
  Top Layer w10: R17.1 R18.2 675.35,328.9 P1.1 740.35,243.9 990.35,243.9 P2.3 1140.35,243.9 1890.35,243.9 P3.3
VIN: C1.1 C2.2 C3.2 C4.2 C5.2 C11.1 C12.2 C13.2 C14.2 C15.2 C16.2 C31.1 J1.1 R1.1 R17.2 SB1.2 TP1.1 U1.30 | length 2509.3
  Top Layer w7.87: v1(570.35,548.9) R17.2 ; C31.1 2043.16,907.68 U1.30
  Bottom Layer w10: 250.35,1613.67 250.35,628.9 280.35,598.9 520.35,598.9 v1(570.35,548.9)
  Bottom Layer w20: 1610.35,1608.9 1610.35,1573.9 1715.35,1468.9 1715.35,988.9 1755.35,948.9 1905.35,948.9 v2(1995.35,858.9)
  other v1: 685.35,1708.9 735.35,1708.9 785.35,1708.9 935.35,1708.9 985.35,1708.9 1035.35,1708.9 1085.35,1708.9 1135.35,1708.9 1185.35,1708.9 1235.35,1708.9 1285.35,1708.9 1335.35,1708.9 1385.35,1708.9 1435.35,1708.9 1485.35,1708.9 1535.35,1708.9 1585.35,1708.9 685.35,1758.9 735.35,1758.9 785.35,1758.9 935.35,1758.9 985.35,1758.9 1035.35,1758.9 1085.35,1758.9 1135.35,1758.9 1185.35,1758.9 1235.35,1758.9 1285.35,1758.9 1335.35,1758.9 1385.35,1758.9 1435.35,1758.9 1485.35,1758.9 1535.35,1758.9 1585.35,1758.9
VOUT: C6.2 C7.2 C8.2 C9.2 C10.1 C19.2 C20.2 C21.2 C22.2 C23.2 C24.1 C34.1 J2.1 JP1.1 R2.2 R31.2 SB4.2 TP2.1 U1.19 | length 4621
  Top Layer w7.87: R31.2 v1(1760.35,738.9) ; U1.19 2287.55,907.68 C34.1
  Bottom Layer w10: v1(1760.35,738.9) 1880.35,738.9 1905.35,713.9 2410.35,713.9 2490.35,793.9 2752.85,793.9 ; JP1.1 2765.35,781.4 ; 2765.55,781.65 2777.8,793.9 ; 2778.05,794.15 2777.8,793.9 ; 4060.35,1604.8 4060.35,673.9 4030.35,643.9 3005.35,643.9 2855.35,793.9 2777.8,793.9 ; 2752.85,793.9 2765.35,793.9 ; 2752.85,793.9 2765.35,781.4 ; 2765.35,781.4 2765.35,793.9 ; 2765.35,793.9 2777.8,793.9
  Bottom Layer w20: v2(2335.35,858.9) 2425.35,948.9 2575.35,948.9 2615.35,988.9 2615.35,1468.9 2720.35,1573.9 2720.35,1608.9
  other v1: 2745.35,1708.9 2795.35,1708.9 2845.35,1708.9 2895.35,1708.9 2945.35,1708.9 2995.35,1708.9 3045.35,1708.9 3095.35,1708.9 3145.35,1708.9 3195.35,1708.9 3245.35,1708.9 3295.35,1708.9 3345.35,1708.9 3395.35,1708.9 3545.35,1708.9 3595.35,1708.9 3645.35,1708.9 2745.35,1758.9 2795.35,1758.9 2845.35,1758.9 2895.35,1758.9 2945.35,1758.9 2995.35,1758.9 3045.35,1758.9 3095.35,1758.9 3145.35,1758.9 3195.35,1758.9 3245.35,1758.9 3295.35,1758.9 3345.35,1758.9 3395.35,1758.9 3545.35,1758.9 3595.35,1758.9 3645.35,1758.9
pads on no net: H1.1 H2.1 H3.1 H4.1 Q1. Q2. Q3. Q4. U1.2 U1.7 U1.9 U1.13

## Polygon pours and split planes (outlines as drawn)
VOUT on Top Layer "LED-" (solid, remove dead copper, pour order 93): 2340.35,851.4 2345.35,856.4 2345.35,903.9 2337.85,911.4 2285.35,911.4 2257.85,883.9 2257.85,873.9 2300.35,873.9 2322.85,851.4
VIN on Top Layer "LED-" (solid, remove dead copper, pour order 92): 1990.35,851.4 1985.35,856.4 1985.35,903.9 1992.85,911.4 2045.35,911.4 2072.85,883.9 2072.85,873.9 2030.35,873.9 2007.85,851.4
PGND on Top Layer "LED-" (solid, remove dead copper, pour order 87): 1905.35,1568.9 1935.35,1598.9 1935.35,1818.9 1955.35,1838.9 2075.35,1838.9 2085.35,1828.9 2085.35,1748.9 2105.35,1728.9 2135.35,1728.9 2155.35,1748.9 2155.35,1818.9 2175.35,1838.9 2315.35,1838.9 2325.35,1828.9 2325.35,1748.9 2345.35,1728.9 2375.35,1728.9 2395.35,1708.9 2395.35,1598.9 2425.35,1568.9 2425.35,1538.9 1905.35,1538.9
AGND on Top Layer "LED-" (solid, remove dead copper, pour order 55): 615.35,578.9 1340.35,578.9 1540.35,778.9 1705.35,778.9 1785.35,698.9 2170.35,698.9 2250.35,778.9 2790.35,778.9 2990.35,578.9 3715.35,578.9 3735.35,558.9 3735.35,238.9 3715.35,218.9 615.35,218.9 595.35,238.9 595.35,558.9
PGND on Top Layer "LED-" (solid, remove dead copper, pour order 82): 225.35,1558.9 245.35,1578.9 4085.35,1578.9 4105.35,1558.9 4105.35,618.9 4085.35,598.9 245.35,598.9 225.35,618.9
NetC17_2 on Top Layer "LED-" (solid, remove dead copper, pour order 89): 1915.35,1948.9 1895.35,1968.9 1725.35,1968.9 1705.35,1948.9 1705.35,1618.9 1725.35,1598.9 1895.35,1598.9 1915.35,1618.9
NetC18_2 on Top Layer "LED-" (solid, remove dead copper, pour order 88): 2415.35,1948.9 2435.35,1968.9 2605.35,1968.9 2625.35,1948.9 2625.35,1618.9 2605.35,1598.9 2435.35,1598.9 2415.35,1618.9
NetC26_1 on Top Layer "LED-" (solid, remove dead copper, pour order 86): 2625.35,2708.9 2605.35,2728.9 2205.35,2728.9 2185.35,2708.9 2185.35,1878.9 2205.35,1858.9 2375.35,1858.9 2395.35,1878.9 2395.35,1968.9 2415.35,1988.9 2605.35,1988.9 2625.35,2008.9
NetC25_1 on Top Layer "LED-" (solid, remove dead copper, pour order 85): 2145.35,2708.9 2125.35,2728.9 1725.35,2728.9 1705.35,2708.9 1705.35,2128.9 1725.35,2108.9 1745.35,2108.9 1765.35,2088.9 1765.35,2008.9 1785.35,1988.9 1915.35,1988.9 1935.35,1968.9 1935.35,1878.9 1955.35,1858.9 2125.35,1858.9 2145.35,1878.9
VIN on Top Layer "LED-" (solid, remove dead copper, pour order 84): 1665.35,1598.9 1685.35,1618.9 1685.35,2708.9 1665.35,2728.9 615.35,2728.9 225.35,2338.89 225.35,1618.9 245.35,1598.9
VOUT on Top Layer "LED-" (solid, remove dead copper, pour order 83): 2665.35,1598.9 2645.35,1618.9 2645.35,2708.9 2665.35,2728.9 3715.36,2728.9 4105.35,2338.9 4105.35,1618.9 4085.35,1598.9
VCC on Top Layer "LED-" (solid, remove dead copper, pour order 52): 2170.35,1068.9 2175.35,1073.9 2225.35,1073.9 2230.35,1068.9 2230.35,953.9 2180.35,903.9 2175.35,903.9 2170.35,908.9
VOUT on Bottom Layer "LED-" (solid, remove dead copper, pour order 78): 2665.35,1598.9 2645.35,1618.9 2645.35,2708.9 2665.35,2728.9 3715.36,2728.9 4105.35,2338.9 4105.35,1618.9 4085.35,1598.9
AGND on Bottom Layer "LED-" (solid, remove dead copper, pour order 57): 615.35,578.9 1340.35,578.9 1540.35,778.9 1705.35,778.9 1760.35,723.9 2160.35,723.9 2215.35,778.9 2790.35,778.9 2990.35,578.9 3715.35,578.9 3735.35,558.9 3735.35,238.9 3715.35,218.9 615.35,218.9 595.35,238.9 595.35,558.9
PGND on Bottom Layer "LED-" (solid, remove dead copper, pour order 91): 225.35,1518.9 285.35,1578.9 4085.35,1578.9 4105.35,1558.9 4105.35,618.9 4085.35,598.9 245.35,598.9 225.35,618.9
PGND on Bottom Layer "LED-" (solid, remove dead copper, pour order 90): 1905.35,1568.9 1935.35,1598.9 1935.35,1818.9 1955.35,1838.9 2075.35,1838.9 2085.35,1828.9 2085.35,1748.9 2105.35,1728.9 2135.35,1728.9 2155.35,1748.9 2155.35,1818.9 2175.35,1838.9 2315.35,1838.9 2325.35,1828.9 2325.35,1748.9 2345.35,1728.9 2375.35,1728.9 2395.35,1708.9 2395.35,1598.9 2425.35,1568.9 2425.35,1538.9 1905.35,1538.9
NetC25_1 on Bottom Layer "LED-" (solid, remove dead copper, pour order 75): 2145.35,2708.9 2125.35,2728.9 1725.35,2728.9 1705.35,2708.9 1705.35,2128.9 1725.35,2108.9 1745.35,2108.9 1765.35,2088.9 1765.35,2008.9 1785.35,1988.9 1915.35,1988.9 1935.35,1968.9 1935.35,1878.9 1955.35,1858.9 2125.35,1858.9 2145.35,1878.9
NetC26_1 on Bottom Layer "LED-" (solid, remove dead copper, pour order 76): 2625.35,2708.9 2605.35,2728.9 2205.35,2728.9 2185.35,2708.9 2185.35,1878.9 2205.35,1858.9 2375.35,1858.9 2395.35,1878.9 2395.35,1968.9 2415.35,1988.9 2605.35,1988.9 2625.35,2008.9
NetC18_2 on Bottom Layer "LED-" (solid, remove dead copper, pour order 77): 2415.35,1948.9 2435.35,1968.9 2605.35,1968.9 2625.35,1948.9 2625.35,1618.9 2605.35,1598.9 2435.35,1598.9 2415.35,1618.9
VIN on Bottom Layer "LED-" (solid, remove dead copper, pour order 80): 1665.35,1598.9 1685.35,1618.9 1685.35,2708.9 1665.35,2728.9 615.35,2728.9 225.35,2338.89 225.35,1618.9 245.35,1598.9
NetC17_2 on Bottom Layer "LED-" (solid, remove dead copper, pour order 81): 1915.35,1948.9 1895.35,1968.9 1725.35,1968.9 1705.35,1948.9 1705.35,1618.9 1725.35,1598.9 1895.35,1598.9 1915.35,1618.9

## Other copper
Top Layer:
  pour cut-out: 196.85,2362.2 196.85,2755.91 590.55,2755.91 590.55,2559.06 cw(c393.7,2559.06) 393.7,2362.2
  pour cut-out: 4133.86,2362.2 4133.86,2755.91 3740.16,2755.91 3740.16,2559.06 ccw(c3937.01,2559.06) 3937.01,2362.2
  pour cut-out: 590.55,196.85 196.85,196.85 196.85,590.55 393.7,590.55 cw(c393.7,393.7) 590.55,393.7
  pour cut-out: 4133.86,590.55 4133.86,196.85 3740.16,196.85 3740.16,393.7 cw(c3937.01,393.7) 3937.01,590.55
Bottom Layer:
  pour cut-out: 590.55,196.85 196.85,196.85 196.85,590.55 393.7,590.55 cw(c393.7,393.7) 590.55,393.7
  pour cut-out: 196.85,2362.2 196.85,2755.91 590.55,2755.91 590.55,2559.06 cw(c393.7,2559.06) 393.7,2362.2
  pour cut-out: 4133.86,2362.2 4133.86,2755.91 3740.16,2755.91 3740.16,2559.06 ccw(c3937.01,2559.06) 3937.01,2362.2
  pour cut-out: 4133.86,590.55 4133.86,196.85 3740.16,196.85 3740.16,393.7 cw(c3937.01,393.7) 3937.01,590.55

## Silkscreen, mask and mechanical layers (free items; w line width, h text height)
Top Overlay:
  lines w6: 2455.35,788.9 2445.35,788.9 2485.35,828.9 2535.35,828.9 ; 2605.35,758.9 2595.35,758.9 2635.35,798.9 ; 3205.35,698.9 ccw(c3235.35,698.9) 3235.35,668.9 3970.35,668.9 ccw(c3970.35,698.9) 4000.35,698.9 4000.35,823.9 ccw(c3970.35,823.9) 3970.35,853.9 3235.35,853.9 ccw(c3235.35,823.9) 3205.35,823.9 3205.35,698.9
  text "SW1" at 1755.19,2276.14 h40
  text "SW2" at 2503.18,2276.14 h40
  text "VIN" at 408.58,2193.28 h80
  text "VOUT" at 3766.7,2193.34 h80
  text "PGND" at 366.37,943.34 h80
  text "PGND" at 3766.37,943.34 h80
  text "SC8701-EVM-RE1" at 3235.35,756.94 h100
  text "OldGerman" at 3235.35,699.74 h60
  text "2023/06" at 3779.74,699.74 h60
  text "VOUT" at 2716.12,626.14 h40
  text "ADJ" at 2731.08,506.35 h40
  text "For ILIM1" at 2740.23,396.28 h40
  text "For ILIM2" at 3338.22,396.28 h40
  text "VHI" at 636.75,226.11 h40
  text "/CE" at 736.42,226.13 h40
  text "AGND" at 813.67,226.14 h40
  text "VHI" at 1036.75,226.11 h40
  text "PWM" at 1124.3,226.11 h40
  text "AGND" at 1213.67,226.14 h40
  text "AGND" at 1413.67,226.14 h40
  text "PG" at 1741.93,226.14 h40
  text "VHI" at 1936.75,226.11 h40
  text "IPWM" at 2019.26,226.11 h40
  text "AGND" at 2113.67,226.14 h40
  text "AGND" at 2313.67,226.14 h40
  text "ITUNE" at 2613.9,226.35 h40
  text "AGND" at 2813.67,226.14 h40
  text "ILIM1" at 3023.86,226.07 h40
  text "ITUNE" at 3213.9,226.35 h40
  text "AGND" at 3413.67,226.14 h40
  text "ILIM2" at 3621.85,226.07 h40
Bottom Overlay:
  text "JLCJLCJLCJLC" at 3680,2624.44 h80
Mechanical 1:
  the board outline again, w10
Mechanical 5:
  lines w6: 2125.98,-1181.1 2204.72,-1181.1 ; 2165.35,-1220.47 2165.35,-1141.73
Mechanical 13:
  lines w6: 1994.68,759.58 cw(c2054,818.9) 1994.68,878.22 ; 2106.03,648.22 ccw(c2165.35,707.54) 2224.68,648.22 ; 2106.03,989.58 cw(c2165.35,930.25) 2224.68,989.58 ; 2336.03,759.58 ccw(c2276.71,818.9) 2336.03,878.22 ; 1935.35,818.9 2165.35,1048.9 2395.35,818.9 2165.35,588.9 1935.35,818.9
Mechanical 15:
  lines w6: 196.85,2362.2 393.7,2362.2 ccw(c393.7,2559.06) 590.55,2559.06 590.55,2755.91 196.85,2755.91 196.85,2362.2
Drill Drawing:
  text ".Legend" at 261.81,2845.15 h27.56

## Dimensions
4133.86,196.85 to 4133.86,2755.91 on Mechanical 5
196.85,2755.91 to 4133.86,2755.91 on Mechanical 5